# EAGLE board Soil_moisture.brd.old (EAGLE 9.3.1)
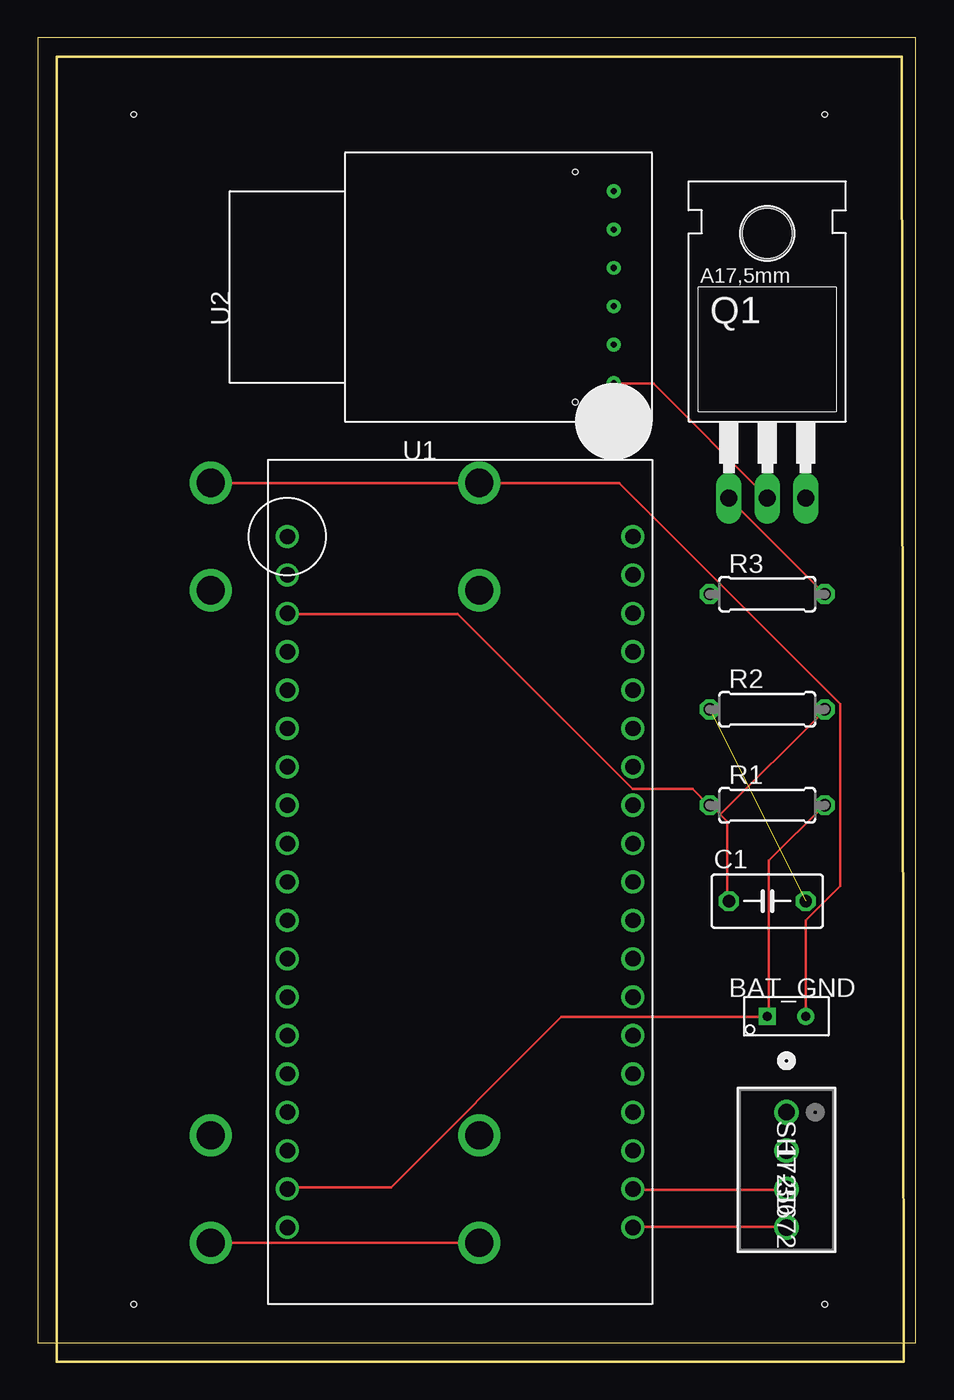
[diagram p0: board, top side]
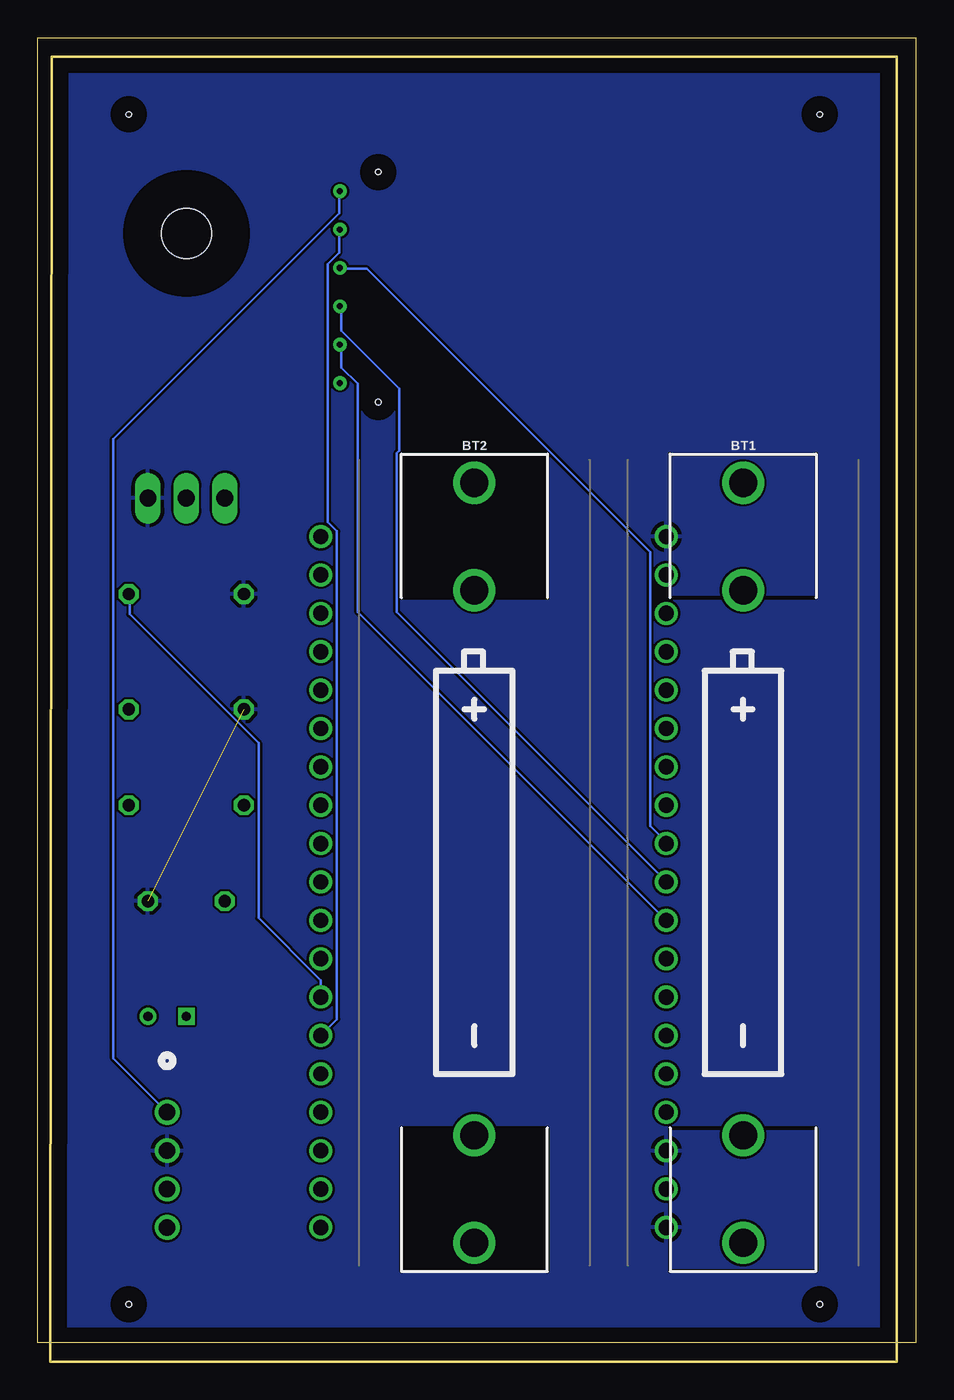
[diagram p1: board, bottom side, seen from below]

Size 58.09 x 87.62 mm. Coordinates in mm from the lower left corner, seen from the top.
Outline: 0,1.27 58.09,1.27 58.09,87.62 0,87.62 0,1.27
Outline: 1.27,86.36 57.15,86.36 57.28,0 1.27,0 1.27,86.36
Copper layers (1*16): Top 0.035mm / dielectric 1.5mm / Bottom 0.035mm
Design rules "default": minimum track width 6mil, minimum drill 0.35mm, track to track 6mil, track to pad 6mil, pad to pad 6mil, via to via 6mil, smd to smd 6mil, copper to edge 40mil, drill to drill 6mil, minimum pad ring 10mil, minimum via ring 8mil, stop-mask expansion 4mil, vias tented up to drill 0mil, thermal gap 10mil
Holes 0.35 mm at 6.35,82.55 52.07,82.55 6.35,3.81 52.07,3.81

## Footprints (pad centres in the part's own frame; a part is rotated, then mirrored left to right if it is on the bottom)
HEADER_2_SULLINS = drill 0.6 square: 1 -1.27,0 | drill 0.6: 2 1.27,0
BATTERY-AA-KIT = drill 1.854: GND@1 25.146,0; GND@2 18.034,0; PWR@1 -25.146,0; PWR@2 -18.034,0
C050-035X075 = drill 0.813 octagon: 1 -2.54,0; 2 2.54,0
TO220 = drill 1.118 long: 1 -2.54,-6.35; 2 0,-6.35; 3 2.54,-6.35 | hole 3.302: 0,11.176
0207/7 = drill 0.813 octagon: 1 -3.81,0; 2 3.81,0
CONN_1725672_PXC = drill 1.092 pad 1.6: 1 0,0; 2 2.54,0; 3 5.08,0; 4 7.62,0
RS_MINI_ULTRA_PRO_V2 = drill 1.016: P$101 -11.43,22.86; P$102 -11.43,20.32; P$103 -11.43,17.78; P$104 -11.43,15.24; P$105 -11.43,12.7; P$106 -11.43,10.16; P$107 -11.43,7.62; P$108 -11.43,5.08; P$109 -11.43,2.54; P$110 -11.43,0; P$111 -11.43,-2.54; P$112 -11.43,-5.08; P$113 -11.43,-7.62; P$114 -11.43,-10.16; P$115 -11.43,-12.7; P$116 -11.43,-15.24; P$117 -11.43,-17.78; P$118 -11.43,-20.32; P$119 -11.43,-22.86; P$120 11.43,-22.86; P$121 11.43,-20.32; P$122 11.43,-17.78; P$123 11.43,-15.24; P$124 11.43,-12.7; P$125 11.43,-10.16; P$126 11.43,-7.62; P$127 11.43,-5.08; P$128 11.43,-2.54; P$129 11.43,0; P$130 11.43,2.54; P$131 11.43,5.08; P$132 11.43,7.62; P$133 11.43,10.16; P$134 11.43,12.7; P$135 11.43,15.24; P$136 11.43,17.78; P$137 11.43,20.32; P$138 11.43,22.86
SD_BREAKOUT_EBAY = drill 0.4: 3V3 5.08,0; CLK -2.54,0; CS 2.54,0; GND -7.62,0; MISO -5.08,0; MOSI 0,0 | hole 0.35: -8.89,2.54; 6.35,2.54

## Placement (x,y rotation side)
BAT_GND  [HEADER_2_SULLINS]  49.53,22.86 0 top
BT1  [BATTERY-AA-KIT]  11.43,33.02 270 bottom
BT2  [BATTERY-AA-KIT]  29.21,33.02 270 bottom
C1  100nF  [C050-035X075]  48.26,30.48 0 top
FRAME1  FRAME-LETTER  [CREATIVE_COMMONS]  20.32,90.17 0 top
Q1  FDP7030BL  [TO220]  48.26,63.5 0 top
R1  1M  [0207/7]  48.26,36.83 0 top
R2  3M3  [0207/7]  48.26,43.18 0 top
R3  10K  [0207/7]  48.26,50.8 0 top
SHT-3D  1725672  [CONN_1725672_PXC]  49.53,16.51 270 top
U1  [RS_MINI_ULTRA_PRO_V2]  27.94,31.75 0 top
U2  [SD_BREAKOUT_EBAY]  38.1,72.39 90 top

## Library data of the parts
BAT_GND U1 U2 = my_library
BT1 BT2 = SparkFun-Batteries; PROD_ID: BATT-08316; SF_SKU: PRT-07949
C1 R1-R3 = adafruit
FRAME1 = SparkFun-Aesthetics
Q1 = transistor-fet
SHT-3D = my_library; ARTICLE_DESCRIPTION: MPT 0,5/ 4-2,54; BUILT_BY: EMA_Anthony; CONTACT_TYPE: Unknown; COPYRIGHT: Copyright (C) 2018 Accelerated Designs. All rights reserved; MANUFACTURER_PART_NUMBER: 1725672; NUMBER_OF_CONNECTION: 4; NUMBER_OF_POSITION_PER_ROW: 4; NUMBER_OF_POTENTIALS: 4; NUMBER_OF_ROWS: 1; NUMBER_OF_SOLDER_PINS_PER_POTENTIALS: 1; PITCH__MM_: 2.54; PLUG_SYSTEM: Unknown; PRODUCTTYP: Printed circuit board terminal; PRODUCT_FAMILY: MPT 0,5; SOLDER_PIN_LENGTH__MM_: 3.5; SOURCELIBRARY: Phoenix_Contact_2020-03-19; VENDOR: Phoenix Contact

## Nets
3V3: U1.P$113
GND: C1.2 Q1.3 R2.1 R3.1 SHT-3D.2 U1.P$101 U1.P$117 U1.P$119
MISO: U1.P$111 U2.MISO
MOSI: U1.P$109 U2.MOSI
N$1: Q1.2 U2.GND
N$2: C1.1 R1.1 R2.2 U1.P$103
N$3: Q1.1 R3.2 U1.P$126
N$4: BT1.GND@1 BT2.GND@1
N$6: BAT_GND.2 BT1.PWR@1 BT2.PWR@1
SCK: U1.P$110 U2.CLK
SCL: SHT-3D.3 U1.P$121
SDA: SHT-3D.4 U1.P$120
SS: U1.P$125 U2.CS
V_BATT: BAT_GND.1 R1.2 U1.P$118
VCC: SHT-3D.1 U2.3V3
VIN: U1.P$116

## Tracks (layer width: path | path; a pad name or v marks a point on that pad's centre or on a via)
GND  (1 unrouted)
  pour Bottom: -1.27,90.17 59.69,90.17 59.69,-1.27 -1.27,-1.27
MISO
  Bottom 0.152: U1.P$111 36.93,49.63 36.93,64.72 38,65.79 38,67.31 U2.MISO
MOSI
  Bottom 0.152: U2.MOSI 38,72.34 36.32,72.34 17.58,53.59 17.58,35.46 16.51,34.39 U1.P$109
N$1
  Top 0.152: U2.GND 38.15,64.72 40.74,64.72 48.21,57.25 Q1.2
N$2
  Top 0.152: 45.16,36.22 44.55,36.83 R1.1 44.4,36.83 43.33,37.9 39.37,37.9 27.79,49.48 16.51,49.48 U1.P$103 | 45.16,36.22 45.62,35.76 45.62,30.58 C1.1 | 45.16,36.22 52.02,43.08 R2.2
N$3
  Top 0.152: Q1.1 R3.2
  Bottom 0.152: U1.P$126 39.37,25.25 43.49,29.36 43.49,40.95 52.02,49.48 52.02,50.7 R3.2
N$4
  Top 0.152: BT2.GND@1 BT1.GND@1
N$6
  Top 0.152: BAT_GND.2 50.8,29.21 53.09,31.5 53.09,43.54 38.46,58.17 BT2.PWR@1 BT1.PWR@1
SCK
  Bottom 0.152: U2.CLK 38,69.75 38,68.22 34.19,64.41 34.19,60.3 34.34,60.15 34.34,49.63 16.51,31.8 U1.P$110
SCL
  Top 0.152: U1.P$121 39.37,11.38 49.43,11.38 SHT-3D.3
SDA
  Top 0.152: U1.P$120 39.37,8.94 49.43,8.94 SHT-3D.4
SS
  Bottom 0.152: U1.P$125 38.3,22.66 38.3,54.97 38.91,55.57 38.91,72.64 38.15,73.41 38.15,74.93 U2.CS
V_BATT
  Top 0.152: R1.2 52.02,36.83 48.36,33.17 48.36,22.96 BAT_GND.1 48.21,22.81 34.65,22.81 23.37,11.53 16.51,11.53 U1.P$118
VCC
  Bottom 0.152: SHT-3D.1 53.09,20.07 53.09,61.06 38.15,76 38.15,77.37 U2.3V3